# Altium PCB PCB1.PcbDoc (part 2 of 3)
Units mil, origin at the board's own origin, x right, y up, seen from the top; angles counter-clockwise.
Board outline 8600 x 11100 mil, 4 copper layers (CAPA1, GND, VCC, Capa2), stack 94.024 mil thick; 162 components, 68 nets, 413 pads, 138 vias.
Unrouted connection lines stored in the file: 33.
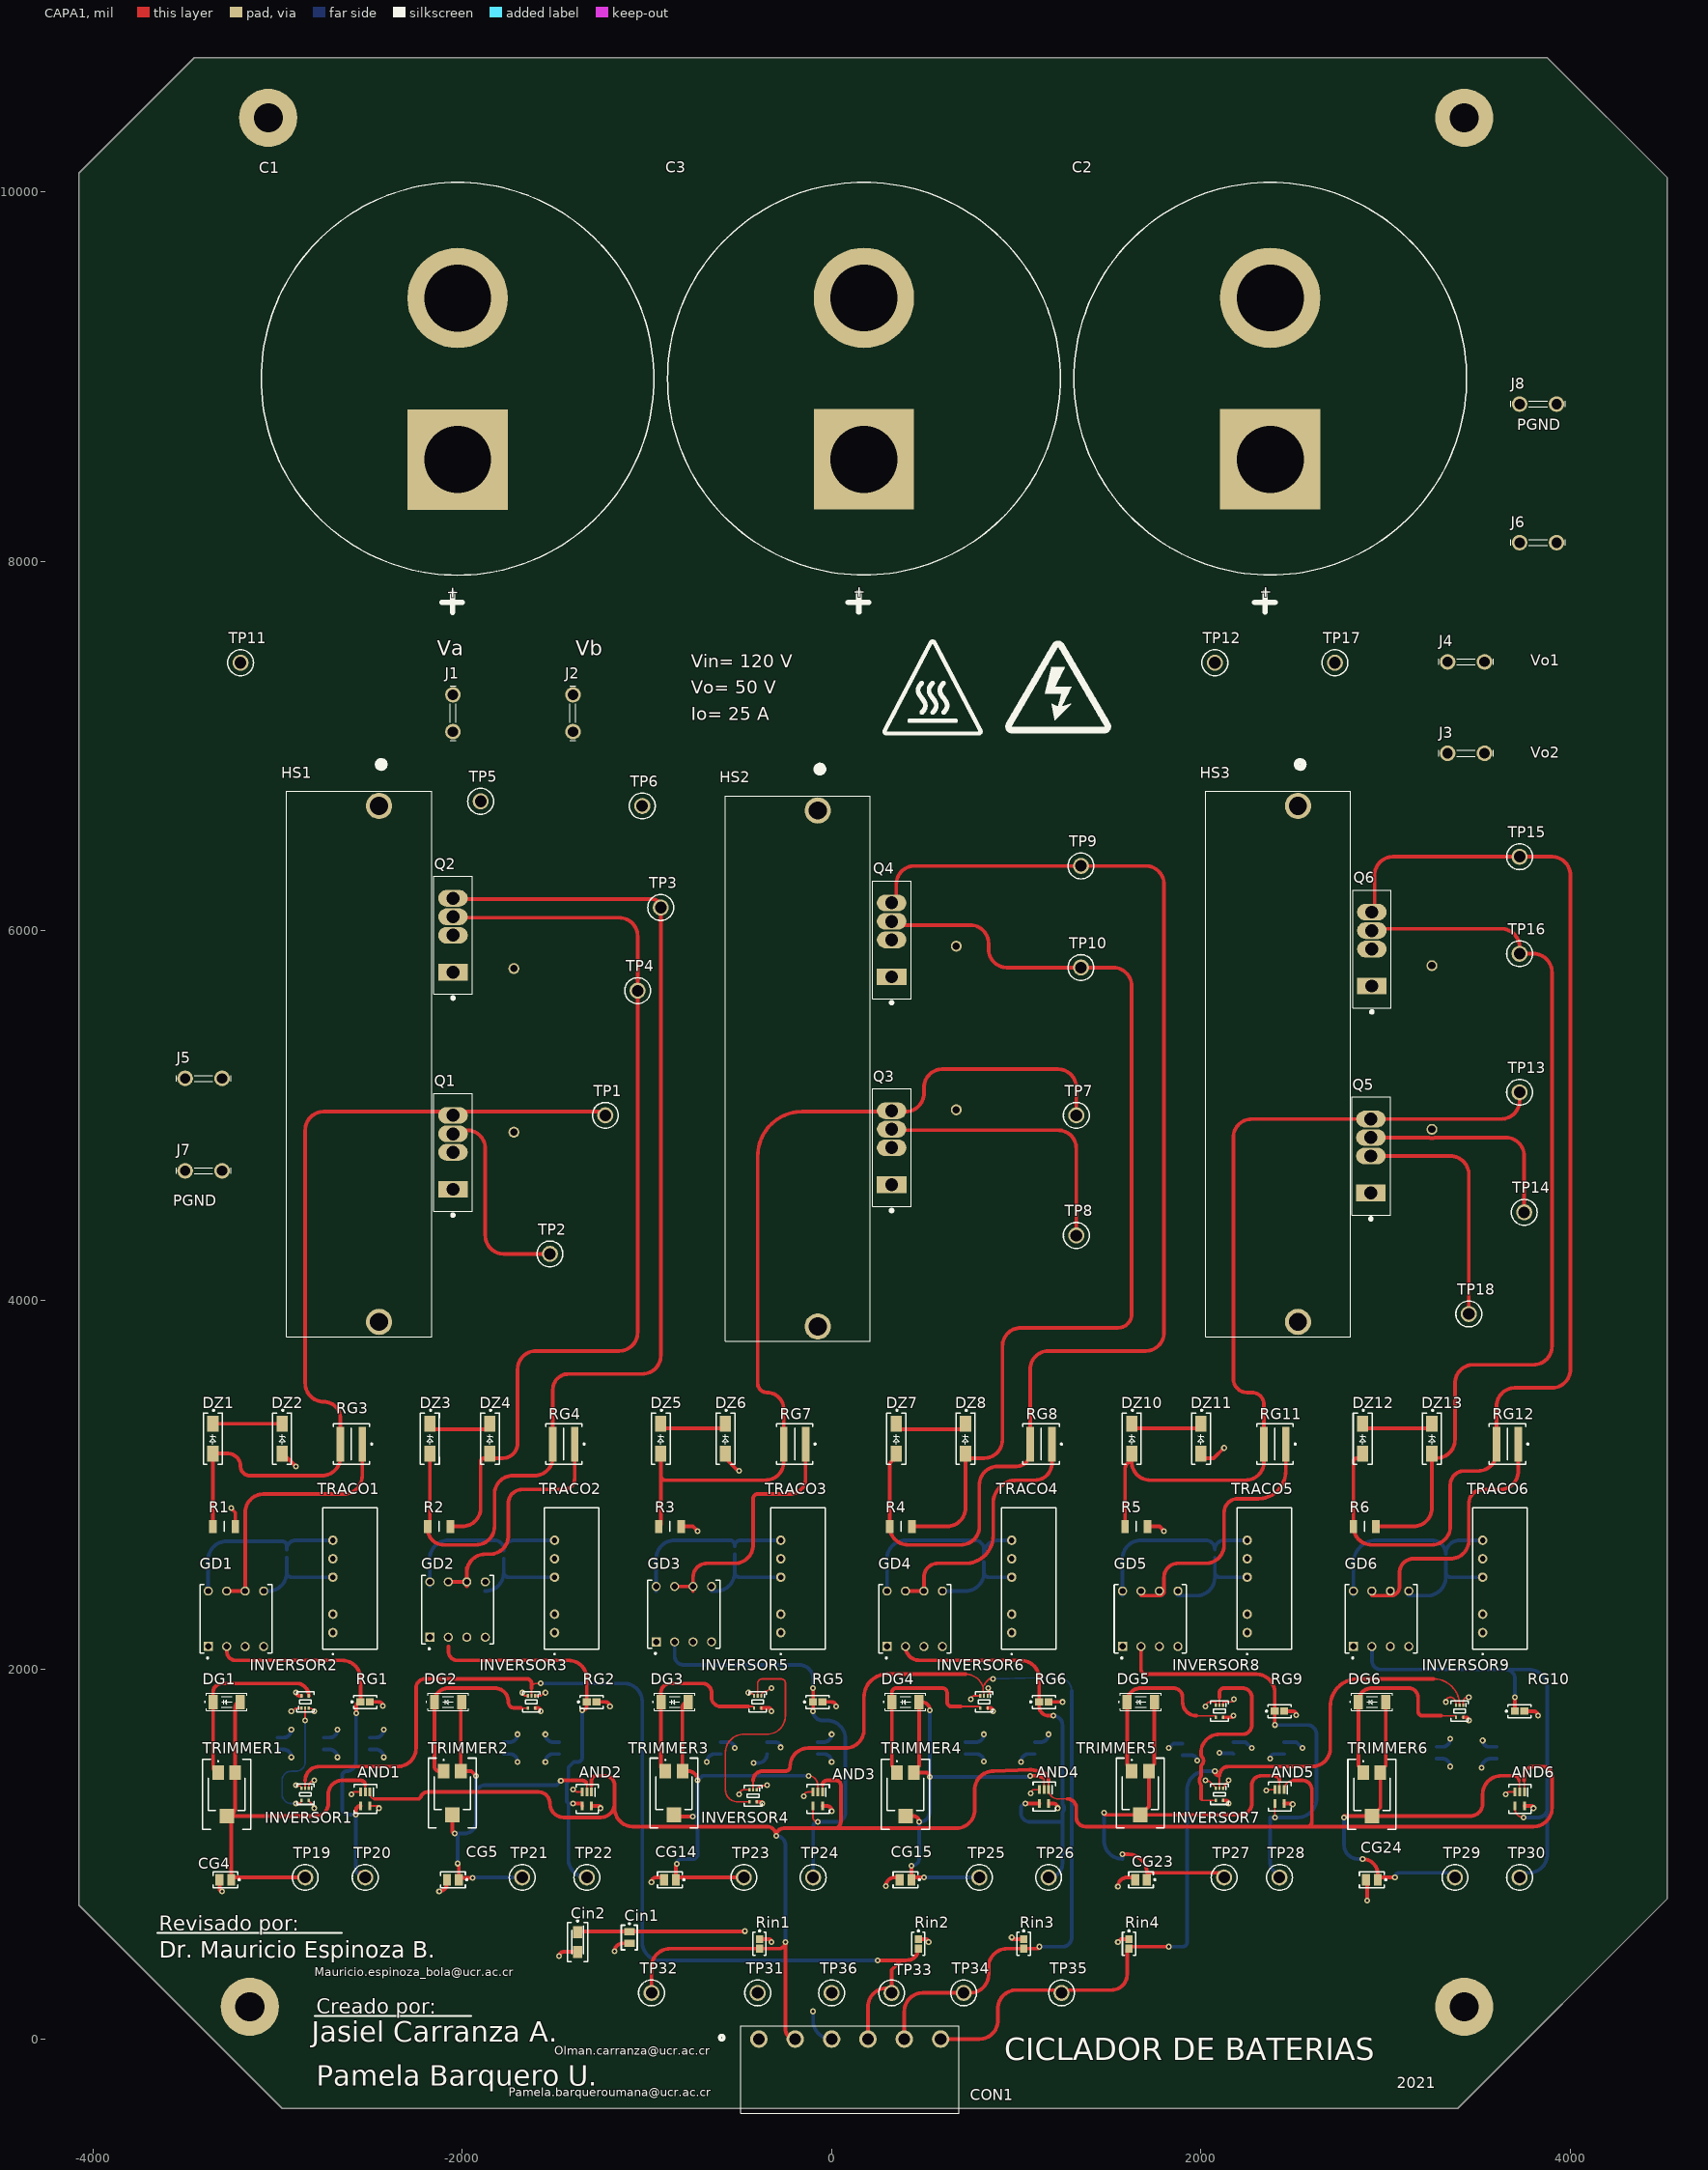
[diagram p0: CAPA1 view]

## Part data (continued)
R1 R2 R3 R4 R5 R6: library part RMCF1206JT20K0‎‎, "RES SMD 20K OHM 5% 1/4W 1206", Case Code (Imperial)=1206, Case Code (Metric)=3216, Manufacturer="Stackpole Electronics", Manufacturer Part Number=RMCF1206JT20K0, Manufacturer_Name="KOA Speer", Manufacturer_Part_Number=RN73H2BTTD1001B10, Max Operating Temperature=155°C, Max Power Dissipation=250mW, Min Operating Temperature=-55°C, Resistance=20kR, Resistor Type="Thick Film", Supplier Part Number 1=RMCF1206JT20K0CT-ND, Temperature Coefficient=200ppm/°C, Tolerance=5%, Case/Package=1206, Category="Chip SMD Resistors", ComponentLink1Description=http://components.arrow.com/part/dataview/43746691S7171900N1174?src-supplier=Arrow+Electronics, ComponentLink1URL=http://components.arrow.com/part/dataview/43746691S7171900N1174?src-supplier=Arrow+Electronics, ComponentLink2Description=https://www.seielect.com/catalog/SEI-RMCF_RMCP.pdf?src-supplier=Avnet, ComponentLink2URL=https://www.seielect.com/catalog/SEI-RMCF_RMCP.pdf?src-supplier=Avnet, ComponentLink3Description=https://www.seielect.com/Catalog/SEI-RMCF_RMCP.pdf?src-supplier=Digi-Key, ComponentLink3URL=https://www.seielect.com/Catalog/SEI-RMCF_RMCP.pdf?src-supplier=Digi-Key, ComponentLink4Description=https://www.seielect.com/catalog/SEI-Packaging.pdf?src-supplier=Digi-Key, ComponentLink4URL=https://www.seielect.com/catalog/SEI-Packaging.pdf?src-supplier=Digi-Key, ComponentLink5Description=http://www.seielect.com/Catalog/SEI-RMC.pdf?src-supplier=Future+Electronics, ComponentLink5URL=http://www.seielect.com/Catalog/SEI-RMC.pdf?src-supplier=Future+Electronics, Contact Plating=Tin,Matte, Datasheet Link=https://www.mouser.de/datasheet/2/219/RN73H-1843478.pdf, Features="Automotive AEC-Q200", Height=0.7mm, Lead Free="Lead Free", Length=0.126inch, Mount="Surface Mount", Number of Terminations=2, Packaging="Tape and Reel", Power Rating=250mW, Pricing 1="1=0.10000, 10=0.02800, 100=0.01150, 1000=0.00518, 2500=0.00450 (USD)", Radiation Hardening=No, RoHS=Yes, RoHS Compliant=Yes, Series=RMCF, Size Code=1206, Stock 1=60988, Supplier 1=Digi-Key, Width=0.063inch
RG1 RG2 RG5 RG6 RG9 RG10: library part RC0603JR-13100RL, "YAGEO - RC0603JR-13100RL - RES, THICK FILM, 100R, 5%, 0.1W, 0603", Case Code (Imperial)=0603, Case Code (Metric)=1608, Manufacturer=Yageo, Manufacturer_Name="YAGEO (PHYCOMP)", Max Operating Temperature=155°C, Min Operating Temperature=-55°C, Power Rating=100mW, Resistance=47, Resistance Tolerance=5%, Resistor Type="Thick Film", Supplier Part Number 1=13-RC0603JR-13100RLCT-ND, Temperature Coefficient=100ppm/°C, Voltage Rating=50V, Case/Package=0603, Category="Chip SMD Resistors", ComponentLink1Description=https://datasheet.ciiva.com/12558/rc0603-272842-12558903.pdf?src-supplier=Mouser, ComponentLink1URL=https://datasheet.ciiva.com/12558/rc0603-272842-12558903.pdf?src-supplier=Mouser, ComponentLink2Description=https://datasheet.ciiva.com/7983/443971-7983750.pdf?src-supplier=Element14, ComponentLink2URL=https://datasheet.ciiva.com/7983/443971-7983750.pdf?src-supplier=Element14, Construction=Rectangular, Datasheet Link=http://www.yageo.com/documents/recent/PYu-RC0603_51_RoHS_L_v5.pdf, Depth=0.8mm, Height=0.55mm, Lead Free="Lead Free", Length=1.6mm, Manufacturer Part Number=RC0603JR-13100RL, Manufacturer_Part_Number=RC0603JR-13100RL, Military Standard=Not, Number of Pins=2, Packaging="Tape and Reel", Pricing 1="1=0.10000, 10=0.02000, 100=0.00800, 1000=0.00360, 2500=0.00312, 5000=0.00258 (USD)", REACH SVHC="No SVHC", RoHS=Yes, RoHS Compliant=Yes, Series=RC, Stock 1=37865, Supplier 1=Digi-Key, Termination=SMD/SMT, Tolerance=5%, Voltage Rating (DC)=50V, Width=0.8mm
RG3 RG4 RG7 RG8 RG11 RG12: "Res Thick Film 1218 47 Ohm 5% 1W ±200ppm/C Pad SMD Automotive T/R", Case Code (Imperial)=1812, Case Code (Metric)=4532, Case/Package=1218, Manufacturer=Vishay, Manufacturer Part Number=RCL121847R0JNEK, Max Operating Temperature=155°C, Max Power Dissipation=1W, Min Operating Temperature=-55°C, Package Quantity=4000, Resistance=47R, Resistor Type="Thick Film", Supplier Part Number 1=RCL47BCT-ND, Temperature Coefficient=200ppm/°C, Tolerance=5%, Voltage Rating=200V, Category="Chip SMD Resistors", ComponentLink1Description=https://datasheet.ciiva.com/2480/dcrcwe3-2480270.pdf?src-supplier=Digi-Key, ComponentLink1URL=https://datasheet.ciiva.com/2480/dcrcwe3-2480270.pdf?src-supplier=Digi-Key, ComponentLink2Description=https://datasheet.ciiva.com/2480/rcle3-2480271.pdf?src-supplier=Digi-Key, ComponentLink2URL=https://datasheet.ciiva.com/2480/rcle3-2480271.pdf?src-supplier=Digi-Key, ComponentLink3Description=https://datasheet.ciiva.com/2480/rcle3-2480272.pdf?src-supplier=Digi-Key, ComponentLink3URL=https://datasheet.ciiva.com/2480/rcle3-2480272.pdf?src-supplier=Digi-Key, Datasheet Link=http://www.vishay.com/docs/20046/rcle3.pdf, Features="Automotive AEC-Q200", Height=0.6mm, Height - Seated (Max)=0.024inch, Length=0.126inch, Manufacturer_Name=Vishay, Manufacturer_Part_Number=RCL121847R0JNEK, Number of Terminations=2, Packaging="Tape and Reel", Power Rating=1W, Pricing 1="1=0.62000, 10=0.47600, 100=0.20010, 1000=0.11040 (USD)", RoHS=Yes, RoHS Compliant=Yes, Series=RCL, Stock 1=6113, Supplier 1=Digi-Key, Termination=SMD/SMT, Weight=0.001041oz, Width=0.181inch
Rin1 Rin2 Rin3 Rin4: library part ESR03EZPJ472, "ESR03EZPJ472", Case Code (Imperial)=0603, Manufacturer=Rohm, Manufacturer_Name="ROHM Semiconductor", Max Operating Temperature=155°C, Max Power Dissipation=250mW, Min Operating Temperature=-55°C, Package Quantity=5000, Resistance=4.7kR, Resistor Type="Thick Film", Supplier Part Number 1=RHM4.7KDCT-ND, Temperature Coefficient=200ppm/°C, Tolerance=5%, Case/Package=0603, Category="Chip SMD Resistors", ComponentLink1Description=https://datasheet.ciiva.com/2468/esr-2468934.pdf?src-supplier=Digi-Key, ComponentLink1URL=https://datasheet.ciiva.com/2468/esr-2468934.pdf?src-supplier=Digi-Key, Datasheet Link=http://www.rohm.com/web/global/datasheet/ESR01MZPF/esr-e, Features="Automotive AEC-Q200", Height=0.55mm, Length=0.063inch, Manufacturer Part Number=ESR03EZPJ472, Manufacturer_Part_Number=ESR03EZPJ472, Number of Terminations=2, Packaging="Tape and Reel", Pricing 1="1=0.10000, 10=0.08200, 100=0.03160, 1000=0.01392, 2500=0.01202 (USD)", RoHS=Yes, RoHS Compliant=Yes, Series=ESR, Stock 1=85174, Supplier 1=Digi-Key, Width=0.031inch
TP1 TP2 TP3 TP4 TP5 TP6 TP7 TP8 TP9 TP10 TP11 TP12 TP13 TP14 TP15 TP16 TP17 TP18 TP19 TP20 TP21 TP22 TP23 TP24 TP25 TP26 TP27 TP28 TP29 TP30 TP31 TP32 TP33 TP34 TP35 TP36: "Test Point, Multipurpose, Red, TH", Color=Red, Manufacturer=Keystone, Supplier Part Number 1=36-5010-ND, ComponentLink1Description="Datasheet URL", ComponentLink1URL=http://www.keyelco.com/userAssets/file/M60-2p60.pdf, CompType="Test Point Loop", ContactFinish=Silver, LatestRevisionDate=2016-02-11, MountType=TH, PackageReference="Red Multipurpose Testpoint", PartNumber=5010, Publisher="Texas Instruments", RoHS=Y, Supplier 1=Digi-Key, Supplier 2=Mouser, Supplier Part Number 2=534-5010, SymbolVersion=2008-04-04
TRACO1 TRACO2 TRACO3 TRACO4 TRACO5 TRACO6: "DC/DC CONVERTER", Case/Package=SIP, Current - Output 1=65mA, Flammability Rating="UL94 V-0", Isolation Voltage=1kV, Manufacturer="Traco Power", Manufacturer Part Number=TMH0515D, Manufacturer_Part_Number="TMH 0515D", Max Input Voltage=5.5V, Max Operating Temperature=75°C, Max Output Power=2W, Min Input Voltage=4.5V, Min Operating Temperature=-40°C, Mouser2 Part Number=495-TMH-0515D, Nominal Input Voltage=5V, Output Voltage=15V, Supplier Part Number 1=1951-2669-ND, Voltage - Output 2=-15V, Category="Voltage Regulators - Switching", ComponentLink1Description=https://datasheet.ciiva.com/26336/157182-da-01-en-dc-dc-wandler-tmh-0515d-26336256.pdf?src-supplier=Conrad, ComponentLink1URL=https://datasheet.ciiva.com/26336/157182-da-01-en-dc-dc-wandler-tmh-0515d-26336256.pdf?src-supplier=Conrad, ComponentLink2Description=https://datasheet.ciiva.com/46393/1648746-46393670.pdf?src-supplier=Element14, ComponentLink2URL=https://datasheet.ciiva.com/46393/1648746-46393670.pdf?src-supplier=Element14, ComponentLink3Description=https://datasheet.ciiva.com/3356/tmh-eng-tds-3356425.pdf?src-supplier=Distrelec, ComponentLink3URL=https://datasheet.ciiva.com/3356/tmh-eng-tds-3356425.pdf?src-supplier=Distrelec, Current - Output 2=65mA, Datasheet Link="https://componentsearchengine.com//TMH 0515D.pdf", Depth=7.5mm, Efficiency=79%, Height=10.45mm, Isolation=Isolated, Length=19.5mm, Manufacturer_Name="Traco Power", Max Input Voltage (DC)=5.5V, Max Output Current=65mA, Min Input Voltage (DC)=4.5V, Mount="Through Hole", Mouser2 Price/Stock=https://www.mouser.com/Search/Refine.aspx?Keyword=495-TMH-0515D, Number of Outputs=2, Number of Pins=5, Output Current=65mA, Output Power=2W, Pricing 1="1=7.20000, 10=6.97900, 25=6.77400, 50=6.56880, 100=6.36350, 250=6.15824, 500=5.74770 (USD)", Radiation Hardening=No, REACH SVHC="No SVHC", RoHS=Yes, RoHS Compliant=Yes, Series=TMH, Stock 1=615, Supplier 1=Digi-Key, Voltage - Output 1=15V, Weight=2.7g, Width=7.5mm
TRIMMER1 TRIMMER2 TRIMMER3 TRIMMER4 TRIMMER5 TRIMMER6: "TRIMMER 20K OHM 0.25W SMD", Color=Black, Manufacturer="Nidec Copal", Manufacturer Part Number=ST4ETB203, Manufacturer_Name="NIDEC COPAL", Max Operating Temperature=125°C, Max Power Dissipation=250mW, Min Operating Temperature=-55°C, Resistance=20kR, Resistor Type=Cermet, Supplier Part Number 1=ST4ETB203CT-ND, Temperature Coefficient=100ppm/°C, Tolerance=20%, Category="Variable Resistors and Potentiometers", ComponentLink1Description=https://datasheet.ciiva.com/2157/st-4-2157765.pdf?src-supplier=Digi-Key, ComponentLink1URL=https://datasheet.ciiva.com/2157/st-4-2157765.pdf?src-supplier=Digi-Key, ComponentLink2Description=https://datasheet.ciiva.com/2157/st-4-2157766.pdf?src-supplier=Digi-Key, ComponentLink2URL=https://datasheet.ciiva.com/2157/st-4-2157766.pdf?src-supplier=Digi-Key, Datasheet Link=https://www.nidec-copal-electronics.com/e/catalog/trimmer/st-4.pdf, Height=2.6mm, Lead Free="Lead Free", Length=0.197inch, Manufacturer_Part_Number=ST-4ETB203, Mount="Surface Mount", Number of Turns=1, Packaging="Tape and Reel", Pricing 1="1=1.20000, 10=1.06000, 25=0.95440, 50=0.91920, 100=0.88380, 250=0.83072 (USD)", Radiation Hardening=No, RoHS=Yes, Series=ST4, Stock 1=792, Supplier 1=Digi-Key, Termination="Gull Wing", Weight=120mg, Width=0.177inch

## Free pads (board coordinates)
  round 314.96 hole 157.48: 1(3425,175) 2(-3150,175) 3(3425,10400) 4(-3050,10400)

## Via types
v1: diameter 32, hole 16, CAPA1 to Capa2, 138 vias

## Nets (pads, with @x,y where several pads share a name; then routed paths per layer and width w, separated by ;. In a path a pad name is that pad's centre, name@x,y a point inside that pad or via, vN(x,y) a via of type N, cw(c..) or ccw(c..) an arc to the next point about the centre after c; other vN are vias at no path point)
+5V: AND1.5 AND2.5 AND3.5 AND4.5 AND5.5 AND6.5 CG1.2 CG2.2 CG3.2 CG6.2 CG7.2 CG10.2 CG12.2 CG13.2 CG16.2 CG17.2 CG20.2 CG21.2 CG22.2 CG25.2 CG26.2 Cin1.1 Cin2.1 CON1.1 INVERSOR1.5 INVERSOR2.5 INVERSOR3.5 INVERSOR4.5 INVERSOR5.5 INVERSOR6.5 INVERSOR7.5 INVERSOR8.5 INVERSOR9.5 RG1.2 RG2.2 RG5.2 RG6.2 RG9.2 RG10.2 TP31.1 TRACO1.1 TRACO2.1 TRACO3.1 TRACO4.1 TRACO5.1 TRACO6.1 | length 3685.8
  CAPA1 w9: INVERSOR1.5@-2830.31,1292.01 -2830.31,1288.56 -2804.4,1262.65 -2804.4,1254.4 v1(-2800,1250) ; AND1.5@-2499.41,1262.6 -2462.6,1262.6 cw(c-2462.6,1250) v1(-2450,1250)
  CAPA1 w20: v1(-2899.47,1877.2) ccw(c-2880.27,1877.2) -2880.27,1857.99 INVERSOR2.5@-2869.69,1857.99 ; RG1.2@-2500,1825 -2451.03,1825 cw(c-2451.03,1803.87) v1(-2429.9,1803.87) ; INVERSOR3.5@-1605.31,1792.01 -1592.01,1792.01 cw(c-1592.01,1775) v1(-1575,1775) ; Cin2.1@-1375,578.15 cw(c-1371.26,578.15) -1371.26,581.89 Cin1.1@-1095,581.89 -472.35,581.89 ccw(c-472.35,584.06) v1(-470.19,584.06) ; AND2.5@-1299.41,1262.6 -1262.6,1262.6 cw(c-1262.6,1250) v1(-1250,1250) ; RG2.2@-1273.82,1825 -1225,1825 cw(c-1225,1800) v1(-1200,1800) ; INVERSOR4.5@-405.32,1284.02 -384.02,1284.02 cw(c-384.02,1275) v1(-375,1275) ; INVERSOR5.5@-380.32,1792.01 -342.01,1792.01 cw(c-342.01,1775) v1(-325,1775) ; RG5.2@-50,1825 0,1825 cw(c0,1800) v1(25,1800) ; AND3.5@-49.41,1262.6 -27.51,1262.6 cw(c-27.51,1233.09) v1(2,1233.09) ; INVERSOR6.5@844.68,1792.01 857.99,1792.01 cw(c857.99,1775) v1(875,1775) ; RG6.2@1175,1825 v1(1250,1825) ; AND4.5@1175.59,1275.2 1199.8,1275.2 cw(c1199.8,1250) v1(1225,1250) ; INVERSOR7.5@2119.68,1292.01 2132.99,1292.01 cw(c2132.99,1275) v1(2150,1275) ; INVERSOR8.5@2119.68,1742.01 2167.01,1742.01 ccw(c2167.01,1750) v1(2175,1750) ; AND5.5@2450.59,1275.2 2491.96,1275.2 cw(c2491.96,1271.04) v1(2496.12,1271.04) ; RG9.2@2450.59,1775 2494.82,1775 cw(c2494.82,1753.74) v1(2516.09,1753.74) ; INVERSOR9.5@3419.68,1742.01 3432.99,1742.01 cw(c3432.99,1725) v1(3450,1725) ; AND6.5@3750.59,1262.6 3787.4,1262.6 cw(c3787.4,1250) v1(3800,1250) ; RG10.2@3750.59,1775 3800,1775 cw(c3800,1750) v1(3825,1750)
  Capa2 w20: CG1.2@-3000,1631.89 -2968.11,1631.89 ccw(c-2968.11,1675) v1(-2925,1675) ; CG2.2@-2750,1631.89 -2718.11,1631.89 ccw(c-2718.11,1675) v1(-2675,1675) ; CG6.2@-2500,1631.89 -2468.11,1631.89 ccw(c-2468.11,1675) v1(-2425,1675) ; CG3.2@-1775,1606.89 -1743.11,1606.89 ccw(c-1743.11,1650) v1(-1700,1650) ; v1(-1550,1650) ccw(c-1506.89,1650) -1506.89,1606.89 CG7.2@-1475,1606.89 ; CG10.2@-600,1606.89 -556.89,1606.89 cw(c-556.89,1575) v1(-525,1575) ; CG12.2@-350,1606.89 -302.64,1606.89 cw(c-302.64,1579.3) v1(-275.05,1579.3) ; CG16.2@-75,1606.89 -43.11,1606.89 ccw(c-43.11,1650) v1(0,1650) ; CG13.2@725,1606.89 781.89,1606.89 ccw(c781.89,1650) v1(825,1650) ; CG17.2@1100,1606.89 1131.89,1606.89 ccw(c1131.89,1650) v1(1175,1650) ; v1(1825,1575) 1850,1600 CG20.2@1900,1600 ; CG21.2@2175,1606.89 2241.84,1606.89 2273.73,1575 v1(2275,1575) ; CG25.2@2450,1606.89 2516.84,1606.89 2548.73,1575 v1(2550,1575) ; CG22.2@3275,1581.89 3306.89,1581.89 ccw(c3306.89,1625) v1(3350,1625) ; v1(3525.49,1616.18) ccw(c3559.77,1616.18) 3559.77,1581.89 CG26.2@3600,1581.89